# Altium PCB BLUESatPC104Template.PcbDoc
Units mm, origin at the board's own origin, x right, y up, seen from the top; angles counter-clockwise.
Board outline 95.45 x 90.32 mm, 2 copper layers (Component Side, Bottom Layer), stack 0.324 mm thick; 21 components, 20 nets, 196 pads, 3 vias.
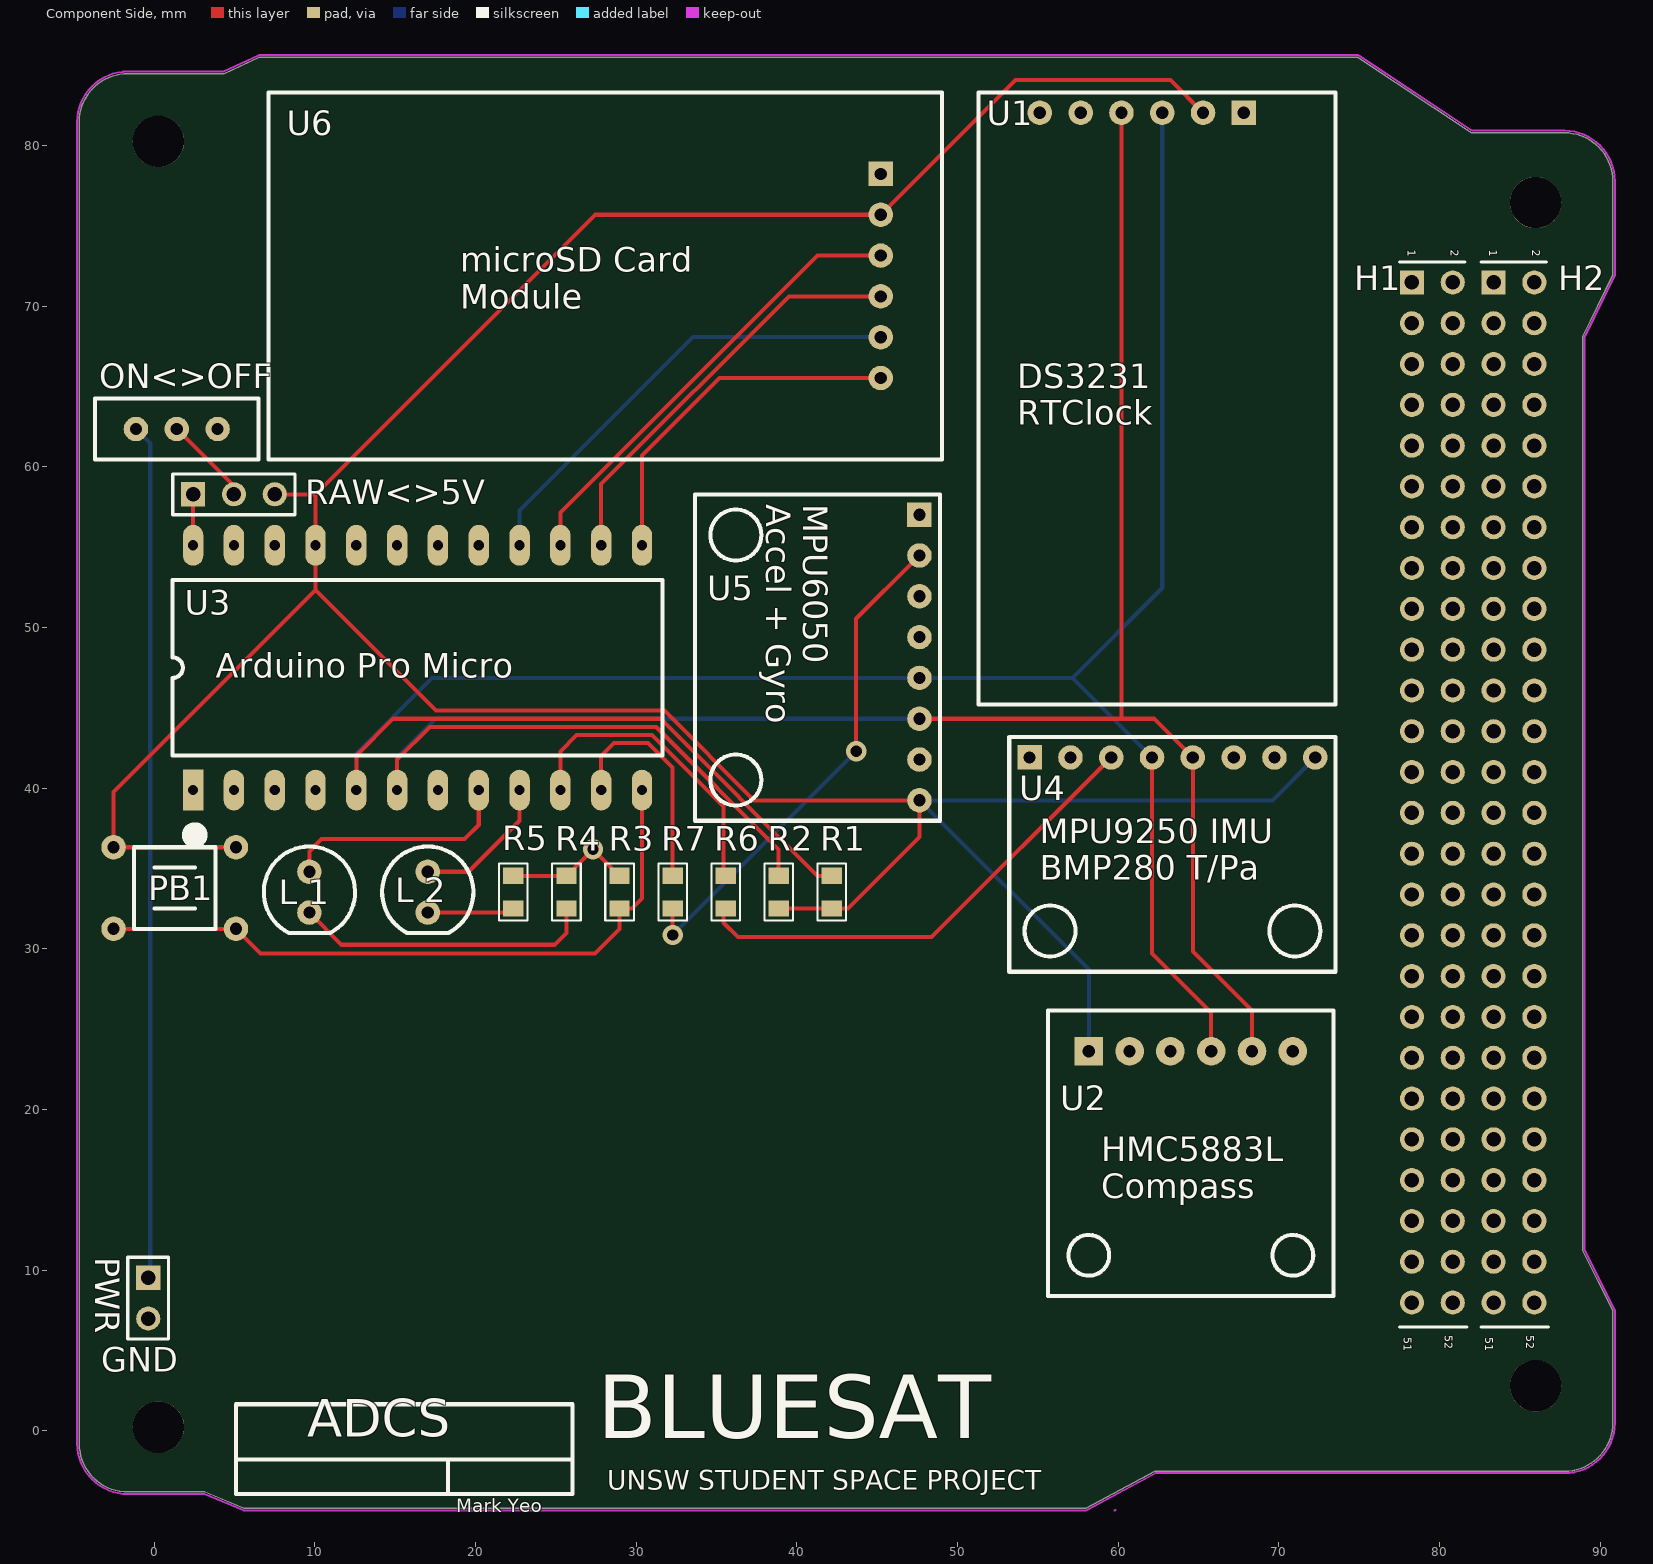
[diagram p0: Component Side view]
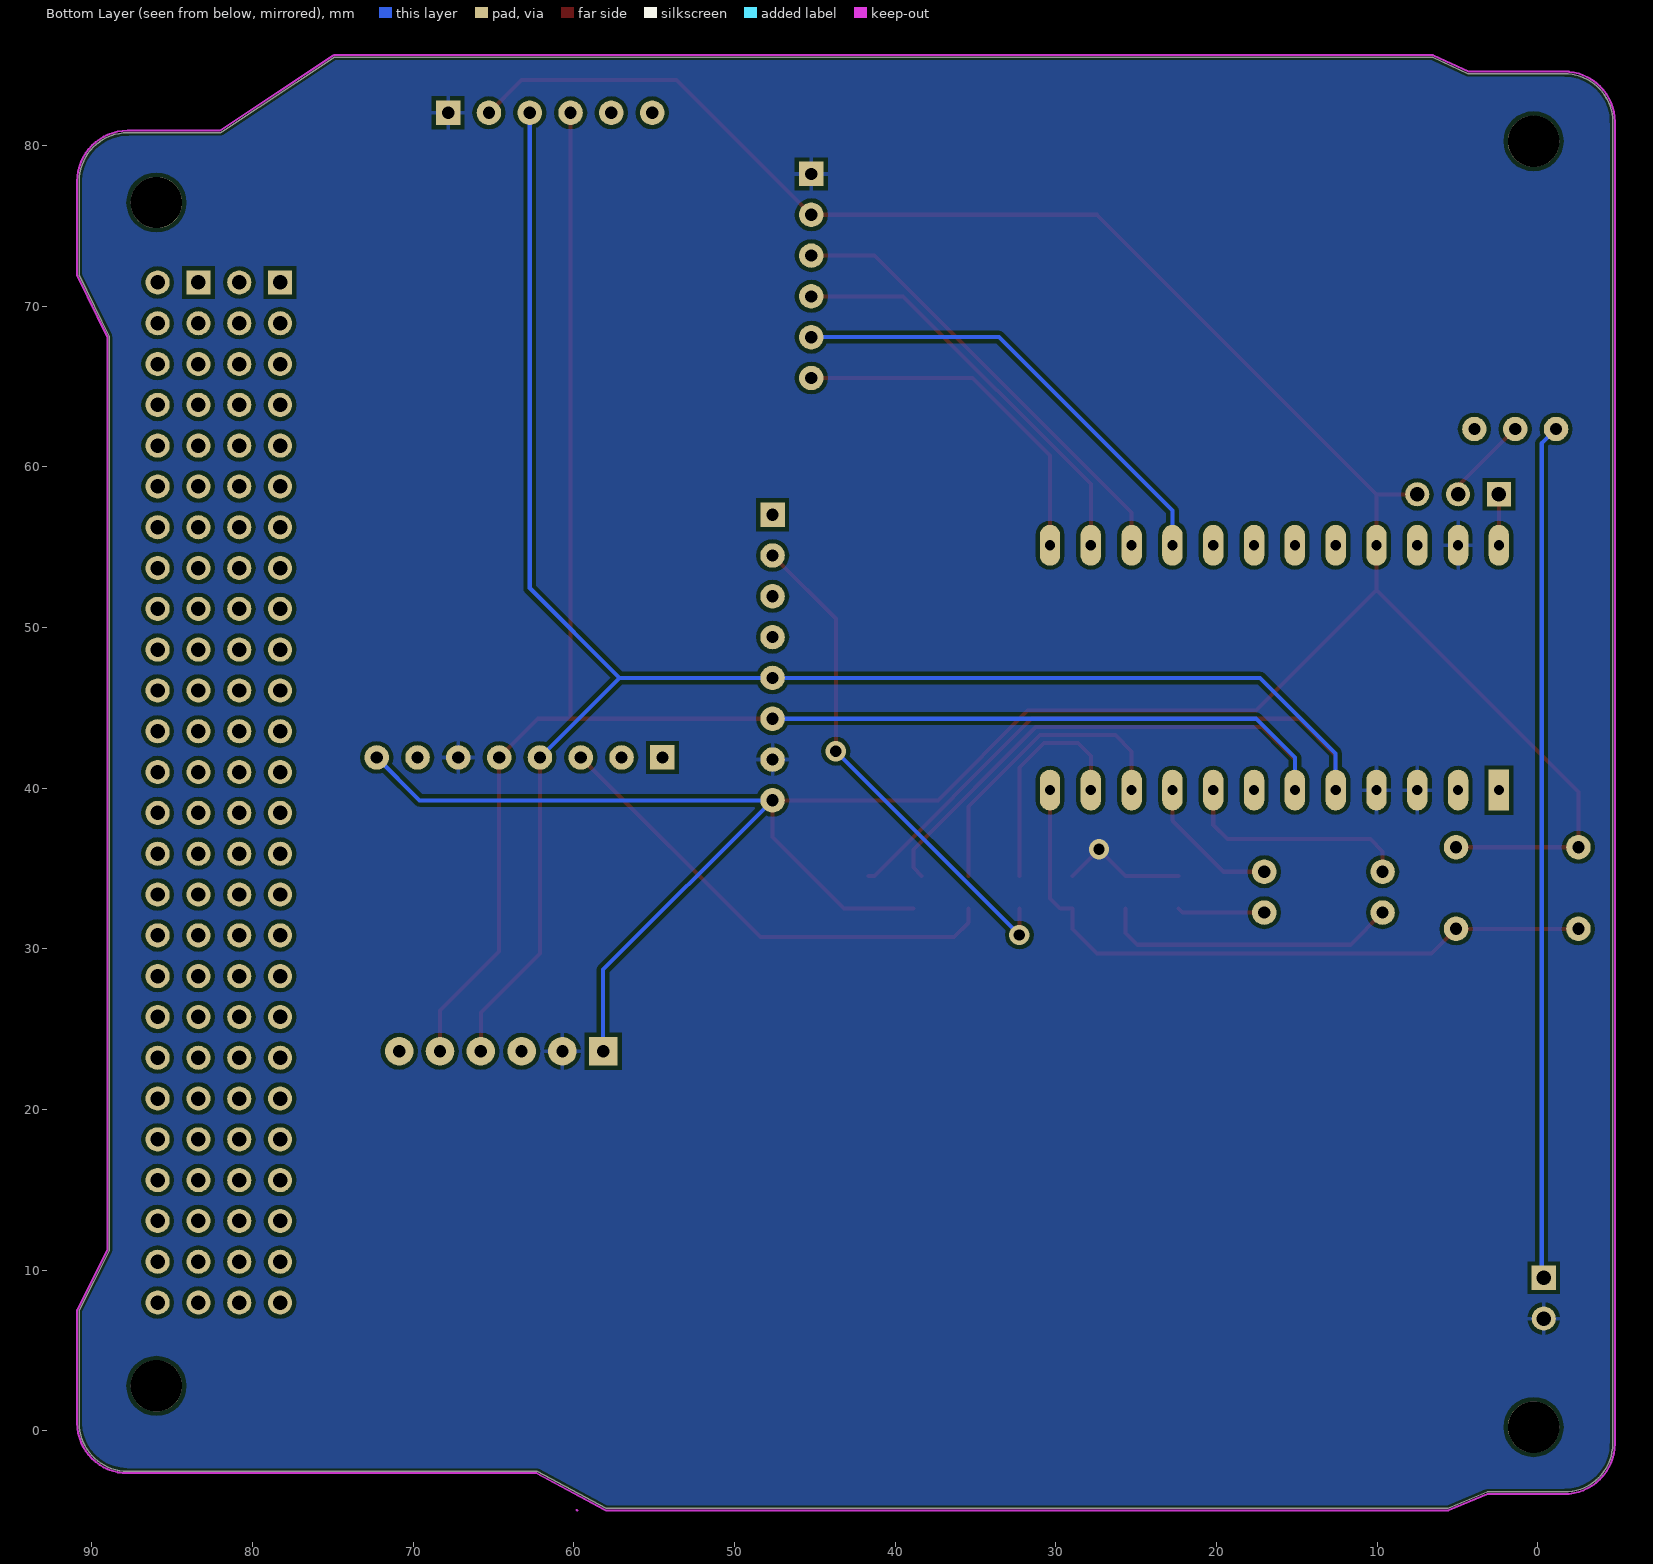
[diagram p1: Bottom Layer view, seen from below]

## Layer stack, top to bottom
Top Solder: solder mask 0.01, Solder Resist, Dk 3.5
Component Side: signal copper 0.035
Dielectric 1: core 0.254, FR-4, Dk 4.2
Bottom Layer: signal copper 0.035
Solder Side: solder mask 0.01, Solder Resist, Dk 3.5

## Board outline
-4.674,-0.813 ccw(c-1.664,-0.8) -1.651,-3.81 3.15,-3.81 5.563,-4.826 57.988,-4.826 62.281,-2.515 87.782,-2.515 ccw(c87.782,0.483) 90.78,0.483 90.78,7.493 88.9,11.227 88.9,68.097 90.78,71.933 90.78,77.775 ccw(c87.77,77.787) 87.782,80.797 81.991,80.797 74.905,85.496 6.528,85.496 4.343,84.48 -1.651,84.48 ccw(c-1.664,81.471) -4.674,81.483

## Design rules (kind name [scope] priority, off if disabled: settings)
Clearance [All] p1: gap=0.254
Clearance "Clearance (Same Net)" [All] p2: gap=0 except(0.203: SMDPad-SMDPad SMDPad-THPad SMDPad-Via)
ComponentClearance [All] p1: gap=0 collisioncheckmode=3 verticalgap=0 showdistances=FALSE
HoleSize HoleSize_1 [All] p1: absolutevalues=TRUE maxlimit=2540 minlimit=0.61 maxpercent=80.000 minpercent=20.000
HoleSize [All] p2: absolutevalues=TRUE maxlimit=2.54 minlimit=0.025 maxpercent=80.000 minpercent=20.000
HoleToHoleClearance mdViaViaSameLayer [All] p1: gap=0.203 allowstackedmicrovias=TRUE
HoleToHoleClearance [All] p2: gap=0.254 allowstackedmicrovias=TRUE
PasteMaskExpansion mlMinCreamFrame [All] p1: expansion=0
PasteMaskExpansion [All] p2: expansion=0
PolygonConnect ThermalVias [IsVia] p1: connectstyle=Direct reliefconductorwidth=0.254 reliefentries=4 polygonreliefangle="90 Angle" airgapwidth=0.254
PolygonConnect [All] p2: connectstyle=Relief reliefconductorwidth=0.254 reliefentries=4 polygonreliefangle="90 Angle" airgapwidth=0.254
RoomDefinition BLUESatPC104Template [InComponentClass('BLUESatPC104Template')] p1 off: confinementstyle=ConfineIn formatcopy=TRUE lockcomponents=FALSE outline 91.973,-3.302 104.038,-3.302 104.038,70.231 91.973,70.231
RoutingVias [All] p1: holewidth=0.711 width=1.27 viastyle="Through Hole" minholewidth=0.711 minwidth=1.27 maxholewidth=0.711 maxwidth=1.27
SilkToSilkClearance [All] p1 off: silktosilkclearance=0.254
SilkToSolderMaskClearance [IsPad] p1 off: minsilkscreentomaskgap=0.254 clearancetoexposedcopper=TRUE
SolderMaskExpansion mlMinStopFrame [All] p1: expansion=0.102
SolderMaskExpansion [All] p2: expansion=0.102
Width Width_1 [All] p1: maxlimit=2540 minlimit=0.152 preferedwidth=0.254
Width [All] p2: maxlimit=0.254 minlimit=0.203 preferedwidth=0.254
24 further rules are at their usual default settings.

## Components (designator, comment, footprint, x,y, rotation, side; value= is the part's Value field where it differs from the comment)
H1 "26X2 Header" "26X2 HEADER" 82.089,72.874 r270 top
H2 "26X2 Header" "26X2 HEADER" 87.169,72.874 r270 top
"L 1" "LED" LEDFOOTPRINT 9.652,32.258 r0 top (schematic designator L1)
"L 2" "LED" LEDFOOTPRINT 17.018,32.258 r0 top (schematic designator L2)
ON<>OFF "ToggleSwitch" SWITCHFOOTPRINT -1.143,62.357 r270 top (schematic designator SW1)
PB1 "PushButton" PCBComponent_1 -2.54,31.242 r0 top
PWR "Header 2" HDR1X2 -0.381,9.525 r270 top (schematic designator P2)
R1 "R0805-GENERIC" 0805R-GENERIC 42.164,32.766 r90 top
R2 "R0805-GENERIC" 0805R-GENERIC 38.862,32.766 r90 top
R3 "R0805-GENERIC" 0805R-GENERIC 28.956,32.766 r90 top
R4 "R0805-GENERIC" 0805R-GENERIC 25.654,32.766 r90 top
R5 "R0805-GENERIC" 0805R-GENERIC 22.352,32.766 r90 top
R6 "R0805-GENERIC" 0805R-GENERIC 35.56,34.29 r270 top
R7 "R0805-GENERIC" 0805R-GENERIC 32.258,34.29 r270 top
RAW<>5V "RAW/5V Select" HDR1X3 2.413,58.293 r0 top (schematic designator P1)
U1 "RTC" DS3FOOTPRINT 55.118,82.042 r270 top
U2 "HMC5883L" HMCFootprint 65.786,23.622 r180 top
U3 "Arduino Pro Micro" "Arduino Pro Micro (DIP 24)" 2.413,39.878 r90 top
U4 "GY-91" GYFOOTPRINT 54.483,41.91 r270 top
U5 "MPU6050" MPU6FOOTPRINT 47.625,57.023 r180 top
U6 "uSD" USDFOOTPRINT 45.212,78.232 r180 top

## Footprints (in the part's own frame and the unit in brackets; to place one, negate y for a bottom-side part, rotate by r counter-clockwise, add the part's x,y. Pads: shape width x height; smd on the part's side, far side on the other; paste and mask are expansions set on the pad)
"26X2 HEADER" [mm]
  rect 1.5x1.5 hole 0.9: 1(1.393,-3.81)
  round 1.5 hole 0.9: 2(1.393,-1.27) 3(3.933,-3.81) 4(3.933,-1.27) 5(6.473,-3.81) 6(6.473,-1.27) 7(9.013,-3.81) 8(9.013,-1.27) 9(11.553,-3.81) 10(11.553,-1.27) 11(14.093,-3.81) 12(14.093,-1.27) 13(16.633,-3.81) 14(16.633,-1.27) 15(19.173,-3.81) 16(19.173,-1.27) 17(21.713,-3.81) 18(21.713,-1.27) 19(24.253,-3.81) 20(24.253,-1.27) 21(26.793,-3.81) 22(26.793,-1.27) 23(29.333,-3.81) 24(29.333,-1.27) 25(31.873,-3.81) 26(31.873,-1.27) 27(34.413,-3.81) 28(34.413,-1.27) 29(36.953,-3.81) 30(36.953,-1.27) 31(39.493,-3.81) 32(39.493,-1.27) 33(42.033,-3.81) 34(42.033,-1.27) 35(44.573,-3.81) 36(44.573,-1.27) 37(47.113,-3.81) 38(47.113,-1.27) 39(49.653,-3.81) 40(49.653,-1.27) 41(52.193,-3.81) 42(52.193,-1.27) 43(54.733,-3.81) 44(54.733,-1.27) 45(57.273,-3.81) 46(57.273,-1.27) 47(59.813,-3.81) 48(59.813,-1.27) 49(62.353,-3.81) 50(62.353,-1.27) 51(64.893,-3.81) 52(64.893,-1.27)
  silkscreen extent 0.13,-4.57 66.42,-0.38, body extent 0,-5 66.29,0, height 8.5
0805R-GENERIC [mil] "RESISTOR 0805"
  rect 40x50 smd: 1(-10,0) 2(70,0)
  silkscreen extent -40,-35 100,35, body extent -11,-25 70,25, height 27
"Arduino Pro Micro (DIP 24)" [mm] "https://grabcad.com/library/arduino-pro-micro-1"
  rect 2.54x1.27 hole 0.635: 1(0,0)
  oval 2.54x1.27 hole 0.635: 2(0,-2.54) 3(0,-5.08) 4(0,-7.62) 5(0,-10.16) 6(0,-12.7) 7(0,-15.24) 8(0,-17.78) 9(0,-20.32) 10(0,-22.86) 11(0,-25.4) 12(0,-27.94) 13(15.24,-27.94) 14(15.24,-25.4) 15(15.24,-22.86) 16(15.24,-20.32) 17(15.24,-17.78) 18(15.24,-15.24) 19(15.24,-12.7) 20(15.24,-10.16) 21(15.24,-7.62) 22(15.24,-5.08) 23(15.24,-2.54) 24(15.24,0)
  silkscreen extent -3.2,-29.21 13.08,1.27, body extent -1.19,-29.19 16.59,5.4, height 9.25
DS3FOOTPRINT [mil] "DS3231"
  rect 60x60 hole 30: 0(0,500)
  round 60 hole 30: 1(0,400) 2(0,300) 3(0,200) 4(0,100) 5(0,0)
  silkscreen extent -50,-150 1450,725, body extent -50,-150 1450,725, height 500
GYFOOTPRINT [mil]
  rect 60x60 hole 30: 0(0,0)
  round 60 hole 30: 1(0,100) 2(0,200) 3(0,300) 4(0,400) 5(0,500) 6(0,600) 7(0,700)
  silkscreen extent -50,-50 525,750, body extent -50,-50 525,750, height 220
HDR1X2 [mm] "Connector; Header; 2 Position"
  rect 1.5x1.5 hole 0.9: 1(0,0)
  round 1.5 hole 0.9: 2(2.54,0)
  silkscreen extent -1.27,-1.27 3.81,1.27
HDR1X3 [mm] "Connector; Header; 3 Position"
  rect 1.5x1.5 hole 0.9: 1(0,0)
  round 1.5 hole 0.9: 2(2.54,0) 3(5.08,0)
  silkscreen extent -1.27,-1.27 6.35,1.27
HMCFootprint [mil]
  round 70 hole 30: 0(-200,0) 1(-100,0) 2(0,0) 3(100,0) 4(200,0)
  rect 70x70 hole 30: 5(300,0)
  silkscreen extent -300,-100 400,600, body extent -300,-100 400,600, height 220
LEDFOOTPRINT [mil]
  round 60 hole 30: 0(0,0) 1(0,100)
  silkscreen extent -112,-50 112,162, body extent -100,-50 100,150, height 300
MPU6FOOTPRINT [mil]
  rect 60x60 hole 30: 0(0,0)
  round 60 hole 30: 1(0,100) 2(0,200) 3(0,300) 4(0,400) 5(0,500) 6(0,600) 7(0,700)
  silkscreen extent -50,-50 550,750, body extent -50,-50 550,750, height 220
PCBComponent_1 [mil]
  round 60 hole 30: 5(0,0) 6(300,0) 7(0,200) 8(300,200)
  silkscreen extent 50,0 250,200, body extent 50,0 250,200, height 300
SWITCHFOOTPRINT [mil]
  round 60 hole 30: 2(0,0) 3(0,100) 4(0,200)
  silkscreen extent -75,-100 75,300, body extent -75,-100 75,300, height 300
USDFOOTPRINT [mil]
  rect 60x60 hole 30: 0(0,0)
  round 60 hole 30: 1(0,100) 2(0,200) 3(0,300) 4(0,400) 5(0,500)
  silkscreen extent -150,-200 1500,700, body extent -150,-200 1500,700, height 220

## Part data
PWR: "Header, 2-Pin"
R1 R2 R3 R4 R5 R6 R7: "GENERIC RESISTOR 0805"
RAW<>5V: library part "Header 3", "Header, 3-Pin"

## Free pads (board coordinates)
  round 3.2 hole 3.2: 1(0.254,0.229) 1(0.254,80.264) 1(85.979,2.794) 1(85.979,76.454)

## Via types
v1: diameter 1.27, hole 0.711, Component Side to Bottom Layer, 3 vias

## Nets (pads, with @x,y where several pads share a name; then routed paths per layer and width w, separated by ;. In a path a pad name is that pad's centre, name@x,y a point inside that pad or via, vN(x,y) a via of type N, cw(c..) or ccw(c..) an arc to the next point about the centre after c; other vN are vias at no path point)
GND: PWR.2 R3.2 R4.2 R5.2 U1.0 U2.4 U3.3 U3.4 U3.23 U4.5 U5.6 U6.0 | length 8
  Component Side w0.254: R5.2 R4.2 v1(27.305,36.195) R3.2
NetL1_21: "L 1.1" U3.8 | length 14.7
  Component Side w0.254: 9.652,34.798 9.652,36.068 10.414,36.83 19.304,36.83 20.193,37.719 U3.8
NetL1_22: "L 1.0" R4.1 | length 18.7
  Component Side w0.254: 9.652,32.258 11.659,30.251 24.917,30.251 25.654,30.988 R4.1
NetL2_21: "L 2.1" U3.9 | length 8.9
  Component Side w0.254: 17.018,34.798 19.558,34.798 22.733,37.973 U3.9
NetL2_22: "L 2.0" R5.1 | length 5.4
  Component Side w0.254: 17.018,32.258 22.098,32.258 R5.1
NetP1_1: RAW<>5V.1 U3.24 | length 3.2
  Component Side w0.254: U3.24 RAW<>5V.1
NetP1_2: ON<>OFF.3 RAW<>5V.2 | length 5.5
  Component Side w0.254: ON<>OFF.3 4.953,58.801 RAW<>5V.2
NetP2_1: ON<>OFF.2 PWR.1 | length 53.3
  Bottom Layer w0.254: ON<>OFF.2 -0.254,61.468 PWR.1@-0.254,9.398
NetPB1_27: PB1.5 PB1.6 R3.1 U3.12 | length 42.4
  Component Side w0.254: PB1.5 PB1.6 6.604,29.718 27.432,29.718 28.956,31.242 R3.1 29.718,32.512 30.353,33.147 U3.12
NetR6_1: R6.1 U3.10 | length 19.2
  Component Side w0.254: U3.10 25.273,42.291 26.289,43.307 30.988,43.307 35.433,38.862 R6.1@35.433,34.544
NetR6_2: R6.2 U4.2 | length 30
  Component Side w0.254: R6.2@35.433,32.512 35.433,31.623 36.322,30.734 48.387,30.734 U4.2
NetR7_1: R7.1 U3.11 | length 15.2
  Component Side w0.254: U3.11 27.813,42.012 28.6,42.799 30.734,42.799 32.258,41.275 R7.1
  Bottom Layer w0.254: U3.11 U3.11@27.813,40.767
NetR7_2: R7.2 U5.1 | length 31.5
  Component Side w0.254: v1(32.258,30.861) R7.2 ; v1(43.688,42.291) 43.688,50.546 47.371,54.229 U5.1@47.625,54.229
  Bottom Layer w0.254: v1(32.258,30.861) v1(43.688,42.291)
NetU3_13: U3.13 U6.5 | length 22.4
  Component Side w0.254: U3.13 30.353,60.706 35.179,65.532 U6.5
NetU3_14: U3.14 U6.3 | length 26
  Component Side w0.254: U3.14 27.813,58.928 39.497,70.612 U6.3
NetU3_15: U3.15 U6.2 | length 28.6
  Component Side w0.254: U3.15 25.273,57.15 41.275,73.152 U6.2
NetU3_16: U3.16 U6.4 | length 29.1
  Bottom Layer w0.254: U3.16 22.733,57.277 33.528,68.072 U6.4
SCL: R2.2 U1.3 U2.1 U3.6 U4.4 U5.5 | length 142.8
  Component Side w0.254: U3.6 15.113,41.783 17.145,43.815 31.242,43.815 38.862,36.195 38.862,35.052 R2.2@38.354,34.544 ; U5.5@47.625,44.069 47.879,44.323 60.198,44.323 ; U1.3 60.198,44.323 ; U2.1 68.326,26.162 64.643,29.845 U4.4 62.23,44.323 60.198,44.323
  Bottom Layer w0.254: U3.6 15.113,41.91 17.526,44.323 47.371,44.323 U5.5@47.625,44.069
SDA: R1.2 U1.2 U2.2 U3.5 U4.3 U5.4 | length 149.4
  Component Side w0.254: U3.5 12.573,42.037 14.859,44.323 31.496,44.323 41.275,34.544 R1.2@41.656,34.544 ; U4.3 62.103,29.718 65.786,26.035 U2.2
  Bottom Layer w0.254: U3.5 12.573,42.164 17.272,46.863 U5.4 57.15,46.863 ; U4.3 57.15,46.863 ; U1.2 62.738,52.451 57.15,46.863
VCC: PB1.7 PB1.8 R1.1 R2.1 RAW<>5V.3 U1.1 U2.5 U3.21 U4.7 U5.7 U6.1 | length 205.8
  Component Side w0.254: PB1.8 PB1.7 -2.54,39.751 10.033,52.324 ; RAW<>5V.3 10.033,58.293 ; R2.1 R1.1 43.18,32.512 47.625,36.957 U5.7@47.625,38.989 ; U5.7 U5.7@47.625,38.989 ; U1.1 63.246,84.074 53.594,84.074 U6.1 27.432,75.692 10.033,58.293 ; 10.033,52.324 17.526,44.831 31.75,44.831 37.338,39.243 47.371,39.243 U5.7@47.625,38.989 ; 10.033,52.324 U3.21 10.033,58.293
  Bottom Layer w0.254: U2.5 58.166,28.702 U5.7 69.596,39.243 U4.7
pads on no net: H1.1 H1.2 H1.3 H1.4 H1.5 H1.6 H1.7 H1.8 H1.9 H1.10 H1.11 H1.12 H1.13 H1.14 H1.15 H1.16 H1.17 H1.18 H1.19 H1.20 H1.21 H1.22 H1.23 H1.24 H1.25 H1.26 H1.27 H1.28 H1.29 H1.30 H1.31 H1.32 H1.33 H1.34 H1.35 H1.36 H1.37 H1.38 H1.39 H1.40 H1.41 H1.42 H1.43 H1.44 H1.45 H1.46 H1.47 H1.48 H1.49 H1.50 H1.51 H1.52 H2.1 H2.2 H2.3 H2.4 H2.5 H2.6 H2.7 H2.8 H2.9 H2.10 H2.11 H2.12 H2.13 H2.14 H2.15 H2.16 H2.17 H2.18 H2.19 H2.20 H2.21 H2.22 H2.23 H2.24 H2.25 H2.26 H2.27 H2.28 H2.29 H2.30 H2.31 H2.32 H2.33 H2.34 H2.35 H2.36 H2.37 H2.38 H2.39 H2.40 H2.41 H2.42 H2.43 H2.44 H2.45 H2.46 H2.47 H2.48 H2.49 H2.50 H2.51 H2.52 ON<>OFF.4 U1.4 U1.5 U2.0 U2.3 U3.1 U3.2 U3.7 U3.17 U3.18 U3.19 U3.20 U3.22 U4.0 U4.1 U4.6 U5.0 U5.2 U5.3

## Polygon pours and split planes (outlines as drawn)
GND on Bottom Layer "Component Side-No Net" (solid, pour order 14): -1.652,-3.81 ccw(c-1.67,-0.803) -1.651,-3.81 3.137,-3.81 cw(c3.137,-3.874) 3.162,-3.815 5.562,-4.826 5.563,-4.826 cw(c5.563,-4.89) 5.563,-4.826 cw(c5.563,-4.889) 5.563,-4.826 cw(c5.538,-4.884) 5.563,-4.826 ccw(c5.563,-4.826) 5.563,-4.826 cw(c5.563,-4.963) 5.563,-4.826 ccw(c5.538,-4.882) 5.563,-4.826 ccw(c5.563,-4.889) 5.563,-4.826 57.988,-4.826 ccw(c57.988,-4.826) 57.988,-4.826 cw(c58.018,-4.881) 57.988,-4.826 62.267,-2.522 cw(c62.297,-2.578) 62.297,-2.514 87.782,-2.514 ccw(c87.782,0.483) 90.779,0.483 90.779,7.493 ccw(c90.78,7.493) 90.779,7.493 cw(c90.837,7.522) 90.779,7.493 cw(c90.843,7.493) 90.779,7.493 88.906,11.213 cw(c88.964,11.242) 88.9,11.242 88.9,68.083 cw(c88.964,68.083) 88.906,68.111 90.779,71.933 cw(c90.836,71.904) 90.779,71.933 ccw(c90.843,71.933) 90.779,71.933 cw(c90.78,71.933) 90.779,71.933 ccw(c90.838,71.905) 90.779,71.933 cw(c90.837,71.904) 90.779,71.933 cw(c90.78,71.933) 90.779,71.933 ccw(c90.836,71.906) 90.779,71.933 ccw(c90.835,71.905) 90.779,71.933 cw(c90.837,71.904) 90.779,71.933 ccw(c90.836,71.907) 90.779,71.933 cw(c90.917,71.933) 90.779,71.933 cw(c90.845,71.933) 90.779,71.933 cw(c90.843,71.933) 90.779,71.933 cw(c90.844,71.932) 90.779,71.933 ccw(c90.836,71.905) 90.779,71.933 cw(c90.837,71.905) 90.779,71.933 90.779,77.775 cw(c90.843,77.775) 90.779,77.776 ccw(c87.77,77.787) 90.779,77.787 ccw(c87.77,77.787) 87.783,80.797 ccw(c87.754,77.782) 87.783,80.797 cw(c87.783,80.861) 87.783,80.797 cw(c87.782,80.861) 87.782,80.797 ccw(c87.782,80.861) 87.783,80.797 ccw(c87.783,80.861) 87.783,80.797 ccw(c87.783,77.777) 87.782,80.797 ccw(c87.782,80.798) 87.782,80.797 82.01,80.797 cw(c82.01,80.861) 81.975,80.808 74.905,85.496 cw(c74.94,85.549) 74.904,85.496 cw(c74.94,85.55) 74.904,85.496 ccw(c74.939,85.55) 74.904,85.496 ccw(c74.94,85.549) 74.905,85.496 cw(c74.938,85.547) 74.904,85.496 cw(c74.939,85.55) 74.904,85.496 ccw(c74.904,85.56) 74.904,85.496 ccw(c74.904,85.603) 74.904,85.496 74.905,85.496 cw(c74.941,85.546) 74.905,85.496 ccw(c74.941,85.546) 74.905,85.496 cw(c74.941,85.554) 74.905,85.496 cw(c74.94,85.55) 74.905,85.496 ccw(c74.94,85.55) 74.905,85.496 74.904,85.496 6.528,85.496 ccw(c6.528,85.496) 6.528,85.496 cw(c6.501,85.553) 6.528,85.496 cw(c6.528,85.562) 6.528,85.496 ccw(c6.528,85.573) 6.528,85.496 ccw(c6.5,85.554) 6.528,85.496 ccw(c6.5,85.554) 6.528,85.496 ccw(c6.501,85.554) 6.528,85.496 cw(c6.528,85.56) 6.528,85.496 cw(c6.501,85.554) 6.528,85.496 cw(c6.499,85.555) 6.528,85.496 cw(c6.501,85.554) 6.528,85.496 4.356,84.486 cw(c4.329,84.544) 4.329,84.48 -1.651,84.48 ccw(c-1.651,84.544) -1.651,84.48 cw(c-1.651,84.544) -1.652,84.48 cw(c-1.67,81.473) -1.651,84.48 -1.652,84.48 ccw(c-1.664,81.471) -4.673,81.484 ccw(c-1.658,81.455) -4.673,81.483 cw(c-4.737,81.483) -4.673,81.483 cw(c-4.737,81.483) -4.673,81.483 cw(c-4.674,81.483) -4.673,81.483 cw(c-1.653,81.483) -4.673,81.483 ccw(c-4.737,81.484) -4.673,81.484 -4.673,81.483 cw(c-4.737,81.483) -4.673,81.483 cw(c-4.737,81.483) -4.673,81.483 -4.673,-0.813 ccw(c-4.674,-0.813) -4.673,-0.813 ccw(c-1.653,-0.813) -4.673,-0.813 ccw(c-4.737,-0.813) -4.673,-0.813 ccw(c-4.737,-0.813) -4.673,-0.813 cw(c-4.737,-0.813) -4.673,-0.813 cw(c-4.737,-0.813) -4.673,-0.813 cw(c-4.737,-0.813) -4.673,-0.813 ccw(c-1.664,-0.8)

## Keep-outs
Keep-Out Layer:
  lines w0.127: 5.513,-4.943 3.124,-3.937 -1.65,-3.937 ; 5.563,-4.953 57.988,-4.953 ; 58.049,-4.938 62.313,-2.642 87.782,-2.642 ccw(c87.782,0.483) 90.907,0.483 90.907,7.493 ; -4.801,-0.813 ccw(c-4.674,-0.813) -4.801,-0.813 ; -4.801,-0.813 ccw(c-1.664,-0.8) -1.65,-3.937 ; -4.801,-0.813 -4.801,81.483 ; -4.801,81.484 cw(c-1.664,81.471) -1.65,84.607 ; -4.801,81.484 ccw(c-4.674,81.483) -4.801,81.483 ; -1.651,-3.937 -1.65,-3.937 ; -1.65,84.607 4.315,84.607 6.474,85.612 ; -1.651,84.607 -1.65,84.607 ; 6.474,85.612 cw(c6.528,85.496) 6.528,85.623 ; 6.474,85.612 ccw(c6.528,85.496) 6.474,85.612 ; 6.474,85.612 cw(c6.528,85.496) 6.528,85.623 ; 6.474,85.612 6.474,85.612 ; 6.474,85.612 6.474,85.612 ; 6.528,85.623 74.905,85.623 ; 74.905,85.623 cw(c74.905,85.496) 74.975,85.602 ; 74.905,85.623 cw(c74.905,85.496) 74.975,85.602 ; 74.975,85.602 82.029,80.924 87.782,80.924 ; 87.783,80.924 cw(c87.77,77.787) 90.907,77.787 cw(c87.77,77.787) 90.907,77.774 ; 87.783,80.924 ccw(c87.782,80.797) 87.782,80.924 ; 90.893,7.55 cw(c90.78,7.493) 90.907,7.493 ; 90.893,7.55 cw(c90.78,7.493) 90.907,7.493 ; 90.893,7.55 89.027,11.257 89.027,68.068 90.894,71.877 ; 90.893,7.55 90.893,7.55 ; 90.894,71.877 ccw(c90.78,71.933) 90.907,71.933 ; 90.894,71.877 ccw(c90.78,71.933) 90.907,71.933 ; 90.894,71.877 ccw(c90.78,71.933) 90.894,71.877 ; 90.894,71.877 90.894,71.877 ; 90.894,71.877 90.894,71.877 ; 90.907,71.933 90.907,77.774 ; 90.907,77.774 90.907,77.775 ; 25.96,93.228 ccw(c26.01,93.345) 26.01,93.218 cw(c26.01,93.345) 25.96,93.228 ; 59.766,-4.953 ccw(c59.766,-4.826) 59.826,-4.938 59.827,-4.938 cw(c59.766,-4.826) 59.766,-4.953

## Silkscreen, mask and mechanical layers (free items; w line width, h text height)
Top Overlay:
  lines w0.254: 5.08,-1.778 26.035,-1.778 ; 18.288,-3.937 18.288,-1.905 ; 5.08,-3.937 5.08,1.651 26.035,1.651 26.035,-3.937 5.08,-3.937
  text "Arduino Pro Micro" at 3.81,46.863 h1.52
  text "GND" at -3.302,3.683 h1.52
  text "ADCS" at 9.525,-1.143 h4
  text "BLUESAT" at 27.559,-1.778 h6.75
  text "UNSW STUDENT SPACE PROJECT" at 28.194,-3.683 h1.2
  text "Mark Yeo" at 18.796,-5.08 h0.85
  text "SENSOR BOARD V1" at 4.572,-8.128 h0.85

## Text inside footprints (layer, text, board x,y; h text height)
H1: Top Overlay "52" at 80.311,5.949 h0.51 r270; Top Overlay "51" at 77.771,5.822 h0.51 r270; Top Overlay "1" at 78.025,73.509 h0.51 r270; Top Overlay "2" at 80.692,73.509 h0.51 r270
H2: Top Overlay "2" at 85.772,73.509 h0.51 r270; Top Overlay "1" at 83.105,73.509 h0.51 r270; Top Overlay "51" at 82.851,5.822 h0.51 r270; Top Overlay "52" at 85.391,5.949 h0.51 r270
U1: Top Overlay "DS3231 / RTClock" at 53.721,62.611 h1.52
U2: Top Overlay "HMC5883L / Compass" at 58.928,14.478 h1.52
U4: Top Overlay "MPU9250 IMU / BMP280 T/Pa" at 55.118,34.29 h1.52
U5: Top Overlay "MPU6050 / Accel + Gyro" at 38.1,57.658 h1.52 r270
U6: Top Overlay "microSD Card / Module" at 19.05,69.85 h1.52